# EAGLE board l2 (EAGLE 9.7.0)
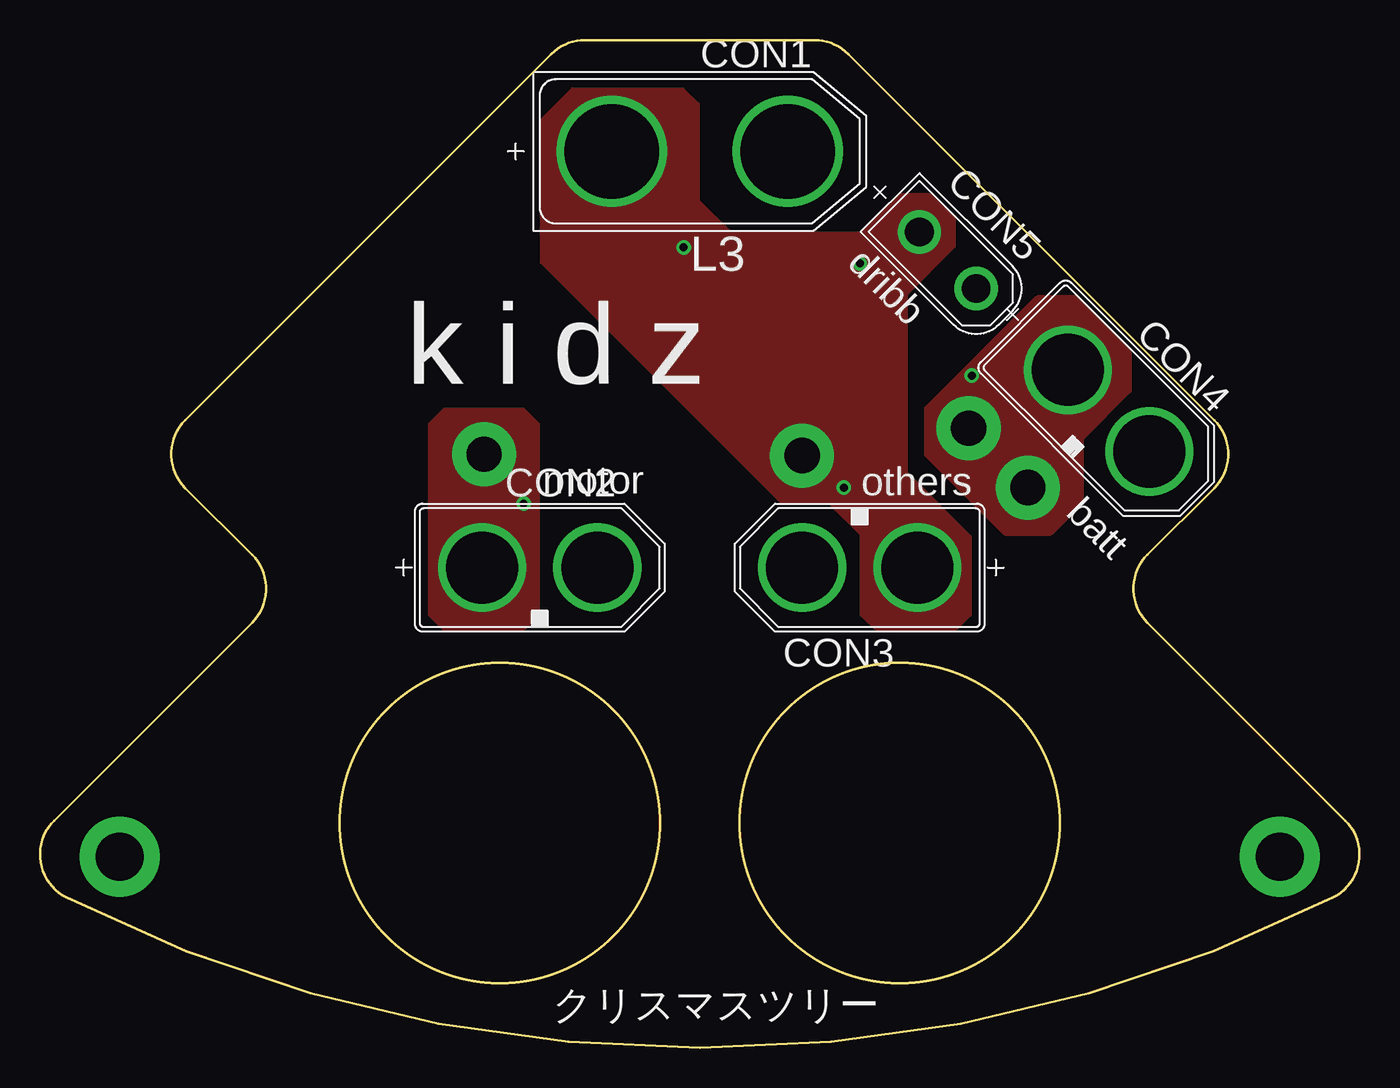
[diagram p0: board, top side]
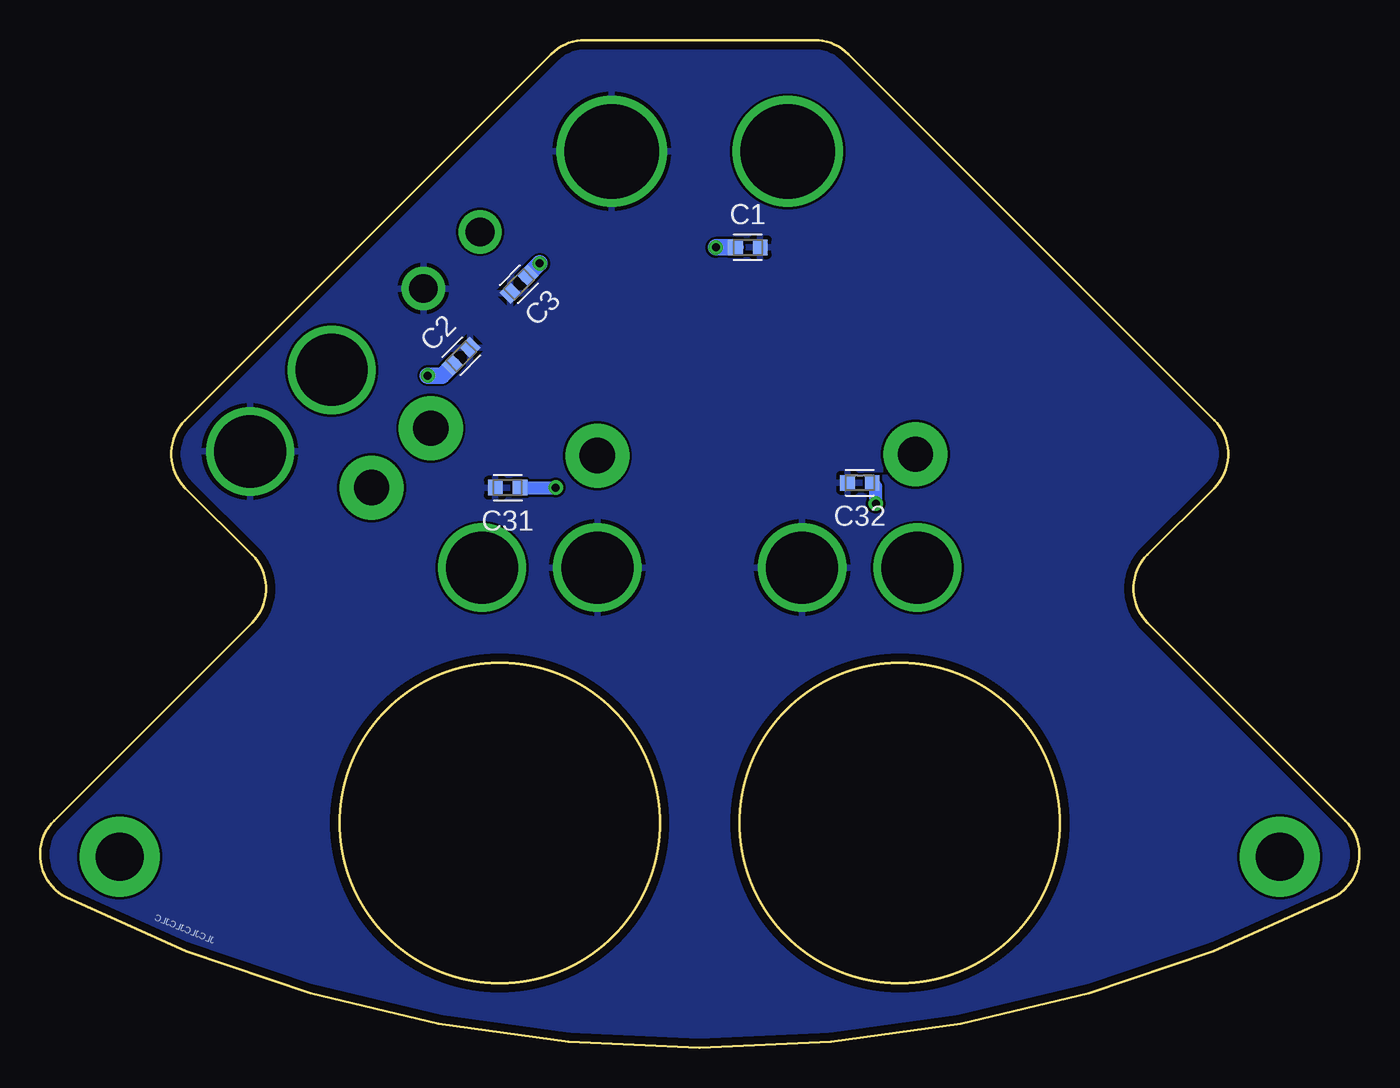
[diagram p1: board, bottom side, seen from below]

Size 82.44 x 62.95 mm. Coordinates in mm from the lower left corner, seen from the top.
Outline: 13.24,26.57 0.88,14.2 arc108 1.65,9.4 arc53 80.79,9.4 arc108 81.56,14.2 69.19,26.57 arc-90 69.19,30.81 73.36,34.97 arc90 73.36,39.22 50.5,62.07 arc45 48.38,62.95 34.06,62.95 arc45 31.94,62.07 9.08,39.22 arc90 9.08,34.97 13.24,30.81 arc-90 13.24,26.57
Outline: circle at 53.72,14.05 radius 10
Outline: circle at 28.72,14.05 radius 10
Copper layers (1*16): Top 0.035mm / dielectric 1.5mm / Bottom 0.035mm
Design rules "default *": minimum track width 6mil, minimum drill 0.35mm, track to track 6mil, track to pad 6mil, pad to pad 6mil, via to via 6mil, smd to smd 6mil, copper to edge 20mil, drill to drill 6mil, minimum pad ring 10mil, minimum via ring 8mil, stop-mask expansion 4mil, vias tented up to drill 20mil, thermal gap 10mil

## Footprints (pad centres in the part's own frame; a part is rotated, then mirrored left to right if it is on the bottom)
CAPC1608X85 = smd 0.921 x 0.97: 1 -0.775,0; 2 0.775,0
XT90PB-M = drill 5.9: + 5.5,0; - -5.5,0
XT60PB-M = drill 4.5: + 3.6,0; - -3.6,0
XT30UPB-M = drill 1.8: + 2.5,0; - -2.5,0

## Placement (x,y rotation side)
C1  0.1 uF  [CAPC1608X85]  38.22,50 0 bottom
C2  0.1 uF  [CAPC1608X85]  56.12,43.2 45 bottom
C3  0.1 uF  [CAPC1608X85]  52.52,47.7 225 bottom
C31  0.1 uF  [CAPC1608X85]  53.22,35 180 bottom
C32  0.1 uF  [CAPC1608X85]  31.22,35.3 180 bottom
CON1  XT90PB-M  [XT90PB-M]  41.22,56 180 top
CON2  XT60PB-M  [XT60PB-M]  31.22,30 180 top
CON3  XT60PB-M  [XT60PB-M]  51.22,30 0 top
CON4  XT60PB-M  [XT60PB-M]  66.77,39.8 135 top
CON5  XT30UPB-M  [XT30UPB-M]  56.72,49.2 135 top

## Library data of the parts
C1-C3 C31 C32 = Capacitor; CATEGORY: Capacitor
CON1-CON5 = amass xt series

## Nets
12V: C1.1 C3.1 C31.1 CON1.+ CON3.+ CON5.+
BATT_12V: C2.1 CON4.+
GND: C1.2 C2.2 C3.2 C31.2 C32.2 CON1.- CON2.- CON3.- CON4.- CON5.-
MOTOR_12V: C32.1 CON2.+

## Tracks (layer width: path | path; a pad name or v marks a point on that pad's centre or on a via)
12V  (via drill 0.5, 2.2 pad 4)
  Bottom 0.813: C31.1 v50.22,35
  Bottom 1.016: C1.1 v40.22,50 | C3.1 v51.22,49 | v51.22,49
  other vias: 47.62,37
  pour Top (no thermals): 51.28,32.04 51.3,32.02 51.3,27.03 52.25,26.08 57.19,26.08 58.14,27.03 58.14,31.97 54.16,35.96 54.14,35.98 54.14,47.02 54.16,47.04 57.14,50.03 57.14,51.97 55.79,53.32 53.65,53.32 51.26,50.94 51.24,50.92 43.2,50.92 43.18,50.94 41.16,52.96 41.14,52.98 41.14,58.97 40.19,59.92 33.25,59.92 31.3,57.97 31.3,49.03 46.25,34.08 49.24,34.08 49.26,34.06
BATT_12V  (via drill 0.5, 2.2 pad 4)
  Bottom 1.016: C2.1 57.32,42 v58.22,42
  other vias: 61.72,35 58.02,38.7
  pour Top (isolate 0.305, no thermals): 63.09,32.3 64.92,34.13 64.92,38.04 64.94,38.12 64.98,38.19 67.92,41.13 67.92,43.87 65.09,46.7 62.35,46.7 55.52,39.87 55.52,37.13 60.35,32.3
GND
  pour Bottom (rank 6): 2.3,-1.8 94.02,-1.8 94.02,34.92 61.14,67.8 18.3,67.8 -13.58,35.92 -13.58,14.08
MOTOR_12V  (via drill 0.5, 2.2 pad 4)
  Bottom 0.813: v30.22,34 30.22,35.08 C32.1
  other vias: 27.74,37.08
  pour Top (no thermals): 25.3,26.2 30.14,26.2 31.02,27.08 31.02,38.92 30.14,39.8 25.3,39.8 24.42,38.92 24.42,27.08
N$1  (via drill 3 pad 5)
  other vias: 4.98,11.94
N$2  (via drill 3 pad 5)
  other vias: 77.46,11.94

## Text on the board
tPlace: L3 | dribb | motor | others | batt | クリスマスツリー
bPlace: JLCJLCJLCJLC
tNames: k i d z